# Altium PCB PCB_rev2_test.PcbDoc
Units mm, origin at the board's own origin, x right, y up, seen from the top; angles counter-clockwise.
Board outline 91.69 x 89.41 mm, 2 copper layers (Top Layer, Bottom Layer); 105 components, 67 nets, 363 pads, 6 vias.
Unrouted connection lines stored in the file: 238.
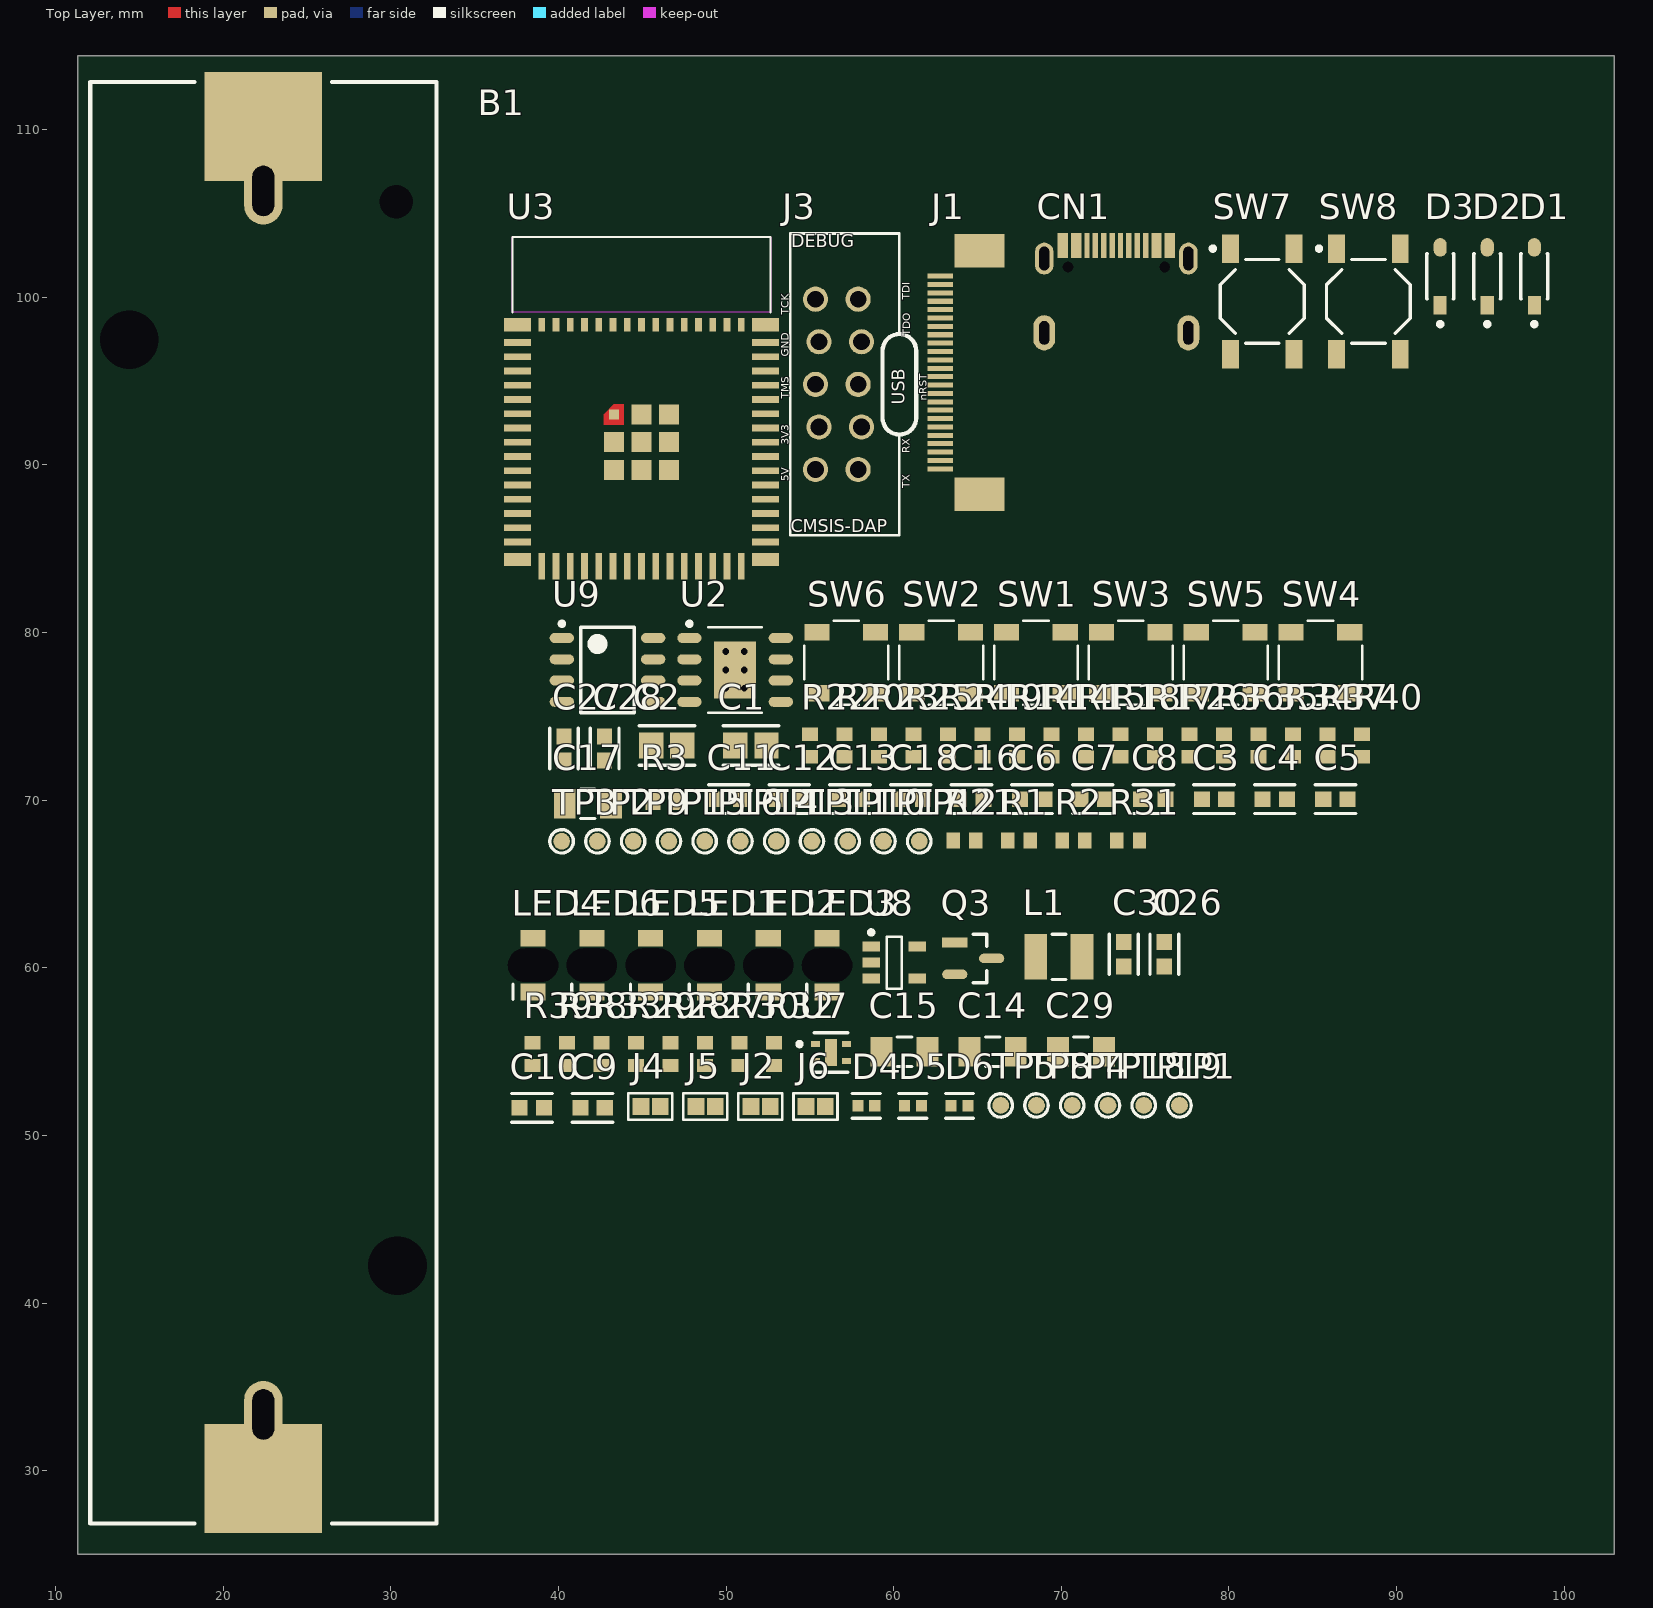
[diagram p0: Top Layer view]
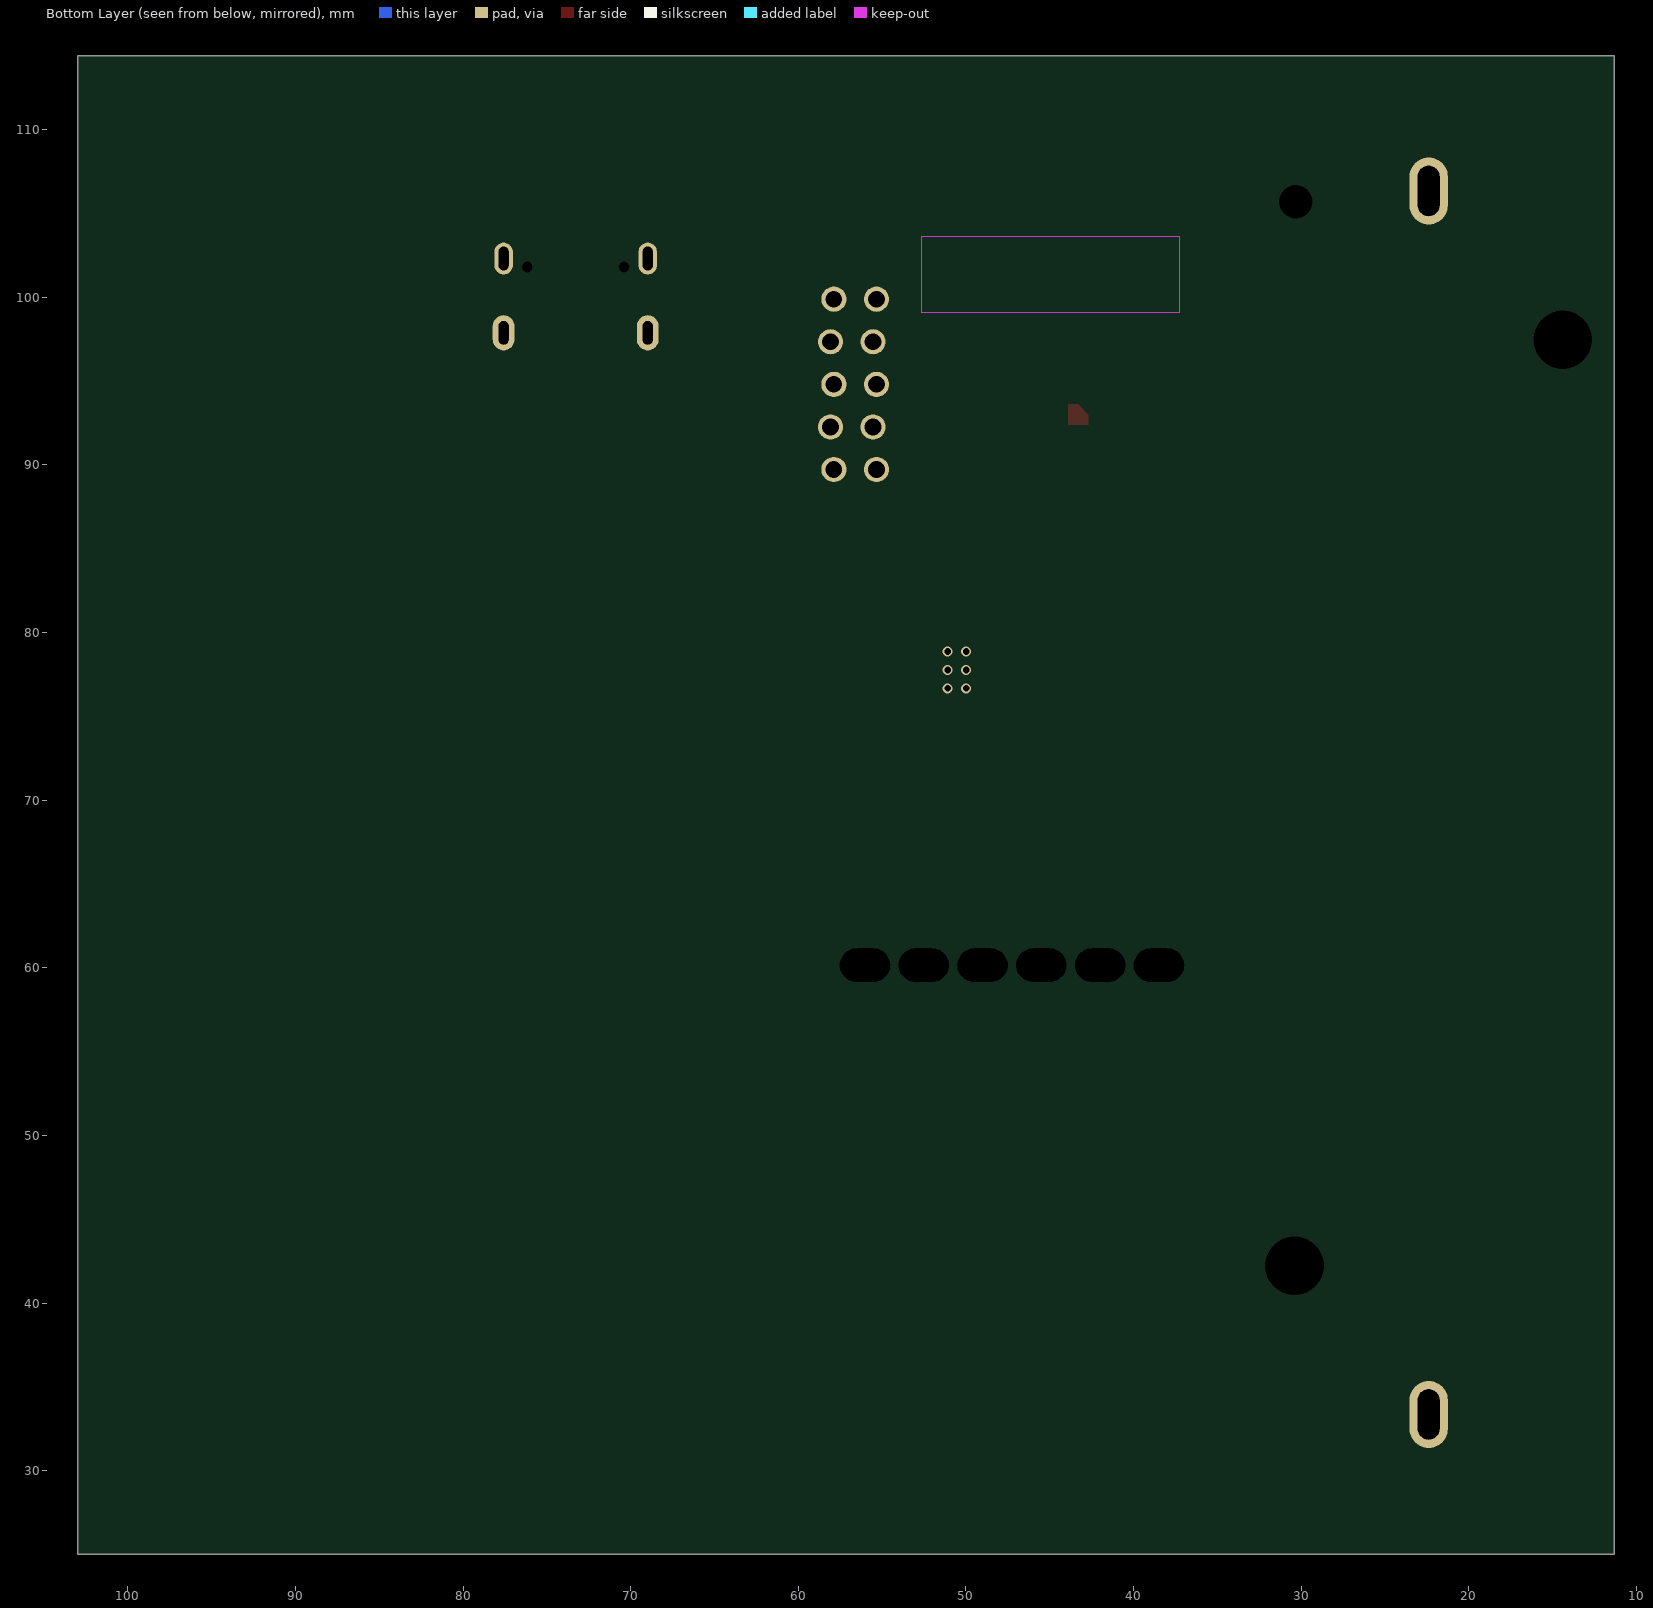
[diagram p1: Bottom Layer view, seen from below]

## Layer stack, top to bottom
Top Solder: solder mask 0.0102, Solder Resist, Dk 3.5
Top Layer: signal copper 0.0356
Dielectric 1: dielectric 0.32, FR-4, Dk 4.8
Bottom Layer: signal copper 0.0356
Bottom Solder: solder mask 0.0102, Solder Resist, Dk 3.5

## Board outline
11.303,25.019 11.303,114.427 102.997,114.427 102.997,25.019

## Design rules (kind name [scope] priority, off if disabled: settings)
Clearance [All] p1: gap=0.254 ignorepadtopadclearanceinfootprint=FALSE except(0: Arc-Hole Track-Hole SMDPad-Hole THPad-Hole Via-Hole Fill-Hole Poly-Hole Region-Hole Text-Hole)
DiffPairsRouting [All] p1: maxlimit=0.254 minlimit=0.254 mostfreqgap=0.254 toplayer_minwidth=0.381 toplayer_maxwidth=0.381 toplayer_prefwidth=0.381 bottomlayer_minwidth=0.381 bottomlayer_maxwidth=0.381 bottomlayer_prefwidth=0.381 maxuncoupledlength=12.7
PolygonConnect [All] p1: connectstyle=Relief reliefconductorwidth=0.254 reliefentries=4 polygonreliefangle="90 Angle" airgapwidth=0.254
RoutingVias [All] p1: holewidth=0.711 width=1.27 viastyle="Through Hole" minholewidth=0.711 minwidth=1.27 maxholewidth=0.711 maxwidth=1.27
SolderMaskExpansion [All] p1: expansion=0.102 istentingtop=FALSE
Width [All] p1: maxlimit=0.254 minlimit=0.254 preferedwidth=0.254
29 further rules are at their usual default settings.

## Classes and differential pairs
differential pair USB: +USB_P -USB_N

## Components (designator, comment, footprint, x,y, rotation, side; value= is the part's Value field where it differs from the comment)
B1 "18650 Li-Ion Battery" "18650 SMD holder" 22.388,69.852 r90 top
C1 "CL21A475KAQNNNE" FP-CL21-IPC_A 51.478,73.261 r0 top
C2 "CL21A475KAQNNNE" FP-CL21-IPC_A 46.463,73.261 r0 top
C3 "CL10A105KB8NNNC" FP-CL10B105KO8NNNC-IPC_B 79.111,70.063 r0 top value=1uF
C4 "CL10A105KB8NNNC" FP-CL10B105KO8NNNC-IPC_B 82.731,70.063 r0 top value=1uF
C5 "CL10A105KB8NNNC" FP-CL10B105KO8NNNC-IPC_B 86.352,70.063 r0 top value=1uF
C6 "CL10A105KB8NNNC" FP-CL10B105KO8NNNC-IPC_B 68.251,70.063 r0 top value=1uF
C7 "CL10A105KB8NNNC" FP-CL10B105KO8NNNC-IPC_B 71.871,70.063 r0 top value=1uF
C8 "CL10A105KB8NNNC" FP-CL10B105KO8NNNC-IPC_B 75.491,70.063 r0 top value=1uF
C9 "CL10A105KB8NNNC" FP-CL10B105KO8NNNC-IPC_B 42.03,51.648 r0 top value=1uF
C10 "CL10A105KB8NNNC" FP-CL10B105KO8NNNC-IPC_B 38.41,51.648 r0 top value=1uF
C11 "CL10A105KB8NNNC" FP-CL10B105KO8NNNC-IPC_B 50.15,70.063 r0 top value=1uF
C12 "CL10A105KB8NNNC" FP-CL10B105KO8NNNC-IPC_B 53.77,70.063 r0 top value=1uF
C13 "CL10A105KB8NNNC" FP-CL10B105KO8NNNC-IPC_B 57.391,70.063 r0 top value=1uF
C14 "CL31A226KPHNNNE" FP-CL31-IPC_B 65.905,54.995 r0 top
C15 "CL31A226KPHNNNE" FP-CL31-IPC_B 60.639,54.995 r0 top
C16 "CL10A105KB8NNNC" FP-CL10B105KO8NNNC-IPC_B 64.631,70.063 r0 top value=1uF
C17 "CL31A226KPHNNNE" FP-CL31-IPC_B 41.749,69.79 r0 top
C18 "CL10A105KB8NNNC" FP-CL10B105KO8NNNC-IPC_B 61.011,70.063 r0 top value=1uF
C26 "CL10A105KB8NNNC" FP-CL10B105KO8NNNC-IPC_B 76.142,60.806 r90 top value=1uF
C27 "CL10A105KB8NNNC" FP-CL10B105KO8NNNC-IPC_B 40.326,73.083 r90 top value=1uF
C28 "CL10A105KB8NNNC" FP-CL10B105KO8NNNC-IPC_B 42.746,73.083 r90 top value=1uF
C29 "CL31A226KPHNNNE" FP-CL31-IPC_B 71.171,54.995 r0 top
C30 "CL10A105KB8NNNC" FP-CL10B105KO8NNNC-IPC_B 73.722,60.806 r90 top value=1uF
CN1 "XKB U262-161N-4BVC11" "XKB U262-161N-4BVC11" 73.277,95.536 r0 top
D1 "MBR0530" FP-425-04-IPC_B 98.217,101.252 r90 top
D2 "MBR0530" FP-425-04-IPC_B 95.409,101.252 r90 top
D3 "MBR0530" FP-425-04-IPC_B 92.601,101.252 r90 top
D4 "LXES15AAA1-133" FP-LXES15-IPC_A 58.362,51.767 r0 top
D5 "LXES15AAA1-133" FP-LXES15-IPC_A 61.143,51.767 r0 top
D6 "LXES15AAA1-133" FP-LXES15-IPC_A 63.923,51.767 r0 top
J1 "XFCN F0501-T-24-20T-R" "XFCN F0501-T-24-20T-R" 62.55,95.519 r90 top
J2 "SolderJumper" SolderJumper_1mm 52.635,51.729 r0 top
J3 "DEBUG" "muselab cmsis-dap frictionfit" 55.334,94.811 r0 top
J4 "SolderJumper" SolderJumper_1mm 46.069,51.729 r0 top
J5 "SolderJumper" SolderJumper_1mm 49.352,51.729 r0 top
J6 "SolderJumper" SolderJumper_1mm 55.918,51.729 r0 top
L1 "CMI322513J680MT" FP-DFE322512C-IPC_B 69.855,60.659 r0 top value=68uH
LED1 "Everlight Elec 23-21B/T1D-CP2Q2TY/2A" "Everlight Elec 23-21B/T1D-CP2Q2TY/2A" 49.002,60.16 r90 top
LED2 "Everlight Elec 23-21B/T1D-CP2Q2TY/2A" "Everlight Elec 23-21B/T1D-CP2Q2TY/2A" 52.51,60.16 r90 top
LED3 "Everlight Elec 23-21B/T1D-CP2Q2TY/2A" "Everlight Elec 23-21B/T1D-CP2Q2TY/2A" 56.018,60.16 r90 top
LED4 "Everlight Elec 23-21B/T1D-CP2Q2TY/2A" "Everlight Elec 23-21B/T1D-CP2Q2TY/2A" 38.478,60.16 r90 top
LED5 "Everlight Elec 23-21B/T1D-CP2Q2TY/2A" "Everlight Elec 23-21B/T1D-CP2Q2TY/2A" 45.494,60.16 r90 top
LED6 "Everlight Elec 23-21B/T1D-CP2Q2TY/2A" "Everlight Elec 23-21B/T1D-CP2Q2TY/2A" 41.986,60.16 r90 top
Q3 "AO3400A" FP-SOT23-IPC_B 64.741,60.562 r0 top
R1 "0603WAF5101T5E" RESC1608X55X30NL15T15 67.473,67.586 r0 top value=5k1
R2 "0603WAF5101T5E" RESC1608X55X30NL15T15 70.731,67.586 r0 top value=5k1
R3 "ERJ-3GEYJ3R0V" RESC1608X55X30ML15T15 46.361,69.944 r0 top value=3R
R14 "0603WAF1501T5E" RESC1608X55X30NL15T15 67.362,73.264 r90 top value=1k5
R14 "0603WAF1004T5E" RESC1608X55X30NL15T15 69.42,73.264 r90 top value=1M
R15 "0603WAF1004T5E" RESC1608X55X30NL15T15 71.478,73.264 r90 top value=1M
R17 "0603WAF1501T5E" RESC1608X55X30NL15T15 75.594,73.264 r90 top value=1k5
R18 "0603WAF1501T5E" RESC1608X55X30NL15T15 73.536,73.264 r90 top value=1k5
R19 "0603WAF1501T5E" RESC1608X55X30NL15T15 65.304,73.264 r90 top value=1k5
R20 "0603WAF1004T5E" RESC1608X55X30NL15T15 57.072,73.264 r90 top value=1M
R21 "0603WAF1501T5E" RESC1608X55X30NL15T15 64.215,67.586 r0 top value=1k5
R22 "0603WAF1004T5E" RESC1608X55X30NL15T15 55.014,73.264 r90 top value=1M
R23 "0603WAF5100T5E" RESC1608X55X30NL15T15 59.13,73.264 r90 top value=10
R24 "0603WAF1004T5E" RESC1608X55X30NL15T15 63.246,73.264 r90 top value=1M
R25 "0603WAF5100T5E" RESC1608X55X30NL15T15 61.188,73.264 r90 top value=10
R26 "0603WAF1004T5E" RESC1608X55X30NL15T15 77.652,73.264 r90 top value=1M
R27 "0603WAF5100T5E" RESC1608X55X30NL15T15 48.728,54.849 r90 top value=10
R28 "0603WAF1004T5E" RESC1608X55X30NL15T15 46.67,54.849 r90 top value=1M
R29 "0603WAF5100T5E" RESC1608X55X30NL15T15 44.612,54.849 r90 top value=10
R30 "0603WAF1004T5E" RESC1608X55X30NL15T15 50.786,54.849 r90 top value=1M
R31 "0603WAF5100T5E" RESC1608X55X30NL15T15 73.989,67.586 r0 top value=10
R32 "0603WAF1004T5E" RESC1608X55X30NL15T15 52.844,54.849 r90 top value=1M
R33 "0603WAF5100T5E" RESC1608X55X30NL15T15 42.554,54.849 r90 top value=10
R34 "0603WAF5101T5E" RESC1608X55X30NL15T15 83.826,73.264 r90 top value=5k1
R35 "0603WAF5101T5E" RESC1608X55X30NL15T15 81.768,73.264 r90 top value=5k1
R36 "0603WAF5101T5E" RESC1608X55X30NL15T15 79.71,73.264 r90 top value=5k1
R37 "0603WAF5101T5E" RESC1608X55X30NL15T15 85.884,73.264 r90 top value=5k1
R38 "0603WAF5101T5E" RESC1608X55X30NL15T15 40.496,54.849 r90 top value=5k1
R39 "0603WAF5101T5E" RESC1608X55X30NL15T15 38.438,54.849 r90 top value=5k1
R40 "0603WAF1501T5E" RESC1608X55X30NL15T15 87.942,73.264 r90 top value=1k5
SW1 "Alps SKRB" "Alps SKRB" 68.483,78.202 r0 top
SW2 "Alps SKRB" "Alps SKRB" 62.825,78.202 r0 top
SW3 "Alps SKRB" "Alps SKRB" 74.141,78.202 r0 top
SW4 "Alps SKRB" "Alps SKRB" 85.457,78.202 r0 top
SW5 "Alps SKRB" "Alps SKRB" 79.799,78.202 r0 top
SW6 "Alps SKRB" "Alps SKRB" 57.167,78.202 r0 top
SW7 "TS-1187A-B-A-B" ESWI-TL3342F160QG_V 81.985,99.761 r0 top
SW8 "TS-1187A-B-A-B" ESWI-TL3342F160QG_V 88.318,99.761 r0 top
TP1 "test point 1.5mm" TP1_FULL 77.048,51.791 r0 top
TP2 "test point 1.5mm" TP1_FULL 42.316,67.548 r90 top
TP3 "test point 1.5mm" TP1_FULL 40.183,67.548 r90 top
TP4 "test point 1.5mm" TP1_FULL 70.647,51.791 r90 top
TP5 "test point 1.5mm" TP1_FULL 66.38,51.791 r90 top
TP8 "test point 1.5mm" TP1_FULL 68.514,51.791 r90 top
TP9 "test point 1.5mm" TP1_FULL 44.45,67.548 r90 top
TP10 "test point 1.5mm" TP1_FULL 57.252,67.548 r90 top
TP11 "test point 1.5mm" TP1_FULL 55.118,67.548 r90 top
TP12 "test point 1.5mm" TP1_FULL 61.519,67.548 r90 top
TP13 "test point 1.5mm" TP1_FULL 52.984,67.548 r90 top
TP14 "test point 1.5mm" TP1_FULL 50.851,67.548 r90 top
TP15 "test point 1.5mm" TP1_FULL 46.584,67.548 r90 top
TP16 "test point 1.5mm" TP1_FULL 48.717,67.548 r90 top
TP17 "test point 1.5mm" TP1_FULL 59.385,67.548 r90 top
TP18 "test point 1.5mm" TP1_FULL 72.781,51.791 r90 top
TP19 "test point 1.5mm" TP1_FULL 74.915,51.791 r90 top
U2 "TP4056" "Generic SOP8-PP" 50.533,77.772 r0 top
U3 "ESP32-S2-MINI-1" XCVR_ESP32-S2-MINI-1 44.95,91.361 r0 top
U7 "SHTC3" FP-SHTC3-MFG 56.252,54.949 r0 top
U8 "HT7830" "Diodes Inc SOT25" 60.028,60.312 r0 top
U9 "XB8608AF" "generic sop8" 42.922,77.772 r0 top

## Footprints (in the part's own frame and the unit in brackets; to place one, negate y for a bottom-side part, rotate by r counter-clockwise, add the part's x,y. Pads: shape width x height; smd on the part's side, far side on the other; paste and mask are expansions set on the pad)
"18650 SMD holder" [mm] "18650 SMD + THT holder"
  round 0 hole 2 unplated: H1(35.839,-7.937)
  round 0 hole 3.5 unplated: H2(27.623,8.001) H3(-27.623,-8.001)
  oval 4x2.3 hole 1.3 slot 3 at 0 deg: NEG(36.5,0) POS(-36.5,0)
  rect 6.5x7 smd: NEG(40.334,0) POS(-40.334,0)
  silkscreen extent -43,-10.33 43,10.33, body extent -43,-10.33 43,10.33, height 14.86
"Alps SKRB" [mm] "Alps SKRB SMD tactile button"
  rect 1.5x1 smd mask+0.05: 1(-1.75,1.825) 2(-1.75,-1.825) 3(1.75,1.825) 4(1.75,-1.825)
  silkscreen extent -2.5,-2.5 2.5,2.5, body extent -2.4,-2.4 2.4,2.4, height 0.55
"Diodes Inc SOT25" [mm] "SOT23, 5-Leads, Body 3.00x2.85mm, Pitch 0.95mm, IPC Medium Density"
  rect 1.05x0.6 smd: 1(-1.375,0.95) 2(-1.375,0) 3(-1.375,-0.95) 4(1.375,-0.95) 5(1.375,0.95)
  silkscreen extent -1.5,-1.55 0.45,1.92, body extent -1.5,-1.55 1.5,1.55, height 1.3
ESWI-TL3342F160QG_V [mm] "SMD, 4-Leads, Body 5x5mm, Pitch 6.3mm"
  rect 1x1.7 smd: 1(-1.9,3.15) 2(-1.9,-3.15) 3(1.9,3.15) 4(1.9,-3.15)
  silkscreen extent -3.07,-2.5 2.5,3.27, body extent -2.5,-2.5 2.5,2.5, height 1.5
"Everlight Elec 23-21B/T1D-CP2Q2TY/2A" [mm] "Reverse mount SMD LED, cool white"
  rect 1x1.5 smd: 1(1.6,0) 2(-1.6,0)
  round 0 hole 2 slot 3 at 90 deg unplated: 4(0,0)
  silkscreen extent -2.05,1.2 -1.15,1.2, body extent -1.6,-0.8 1.6,0.8, height 0.32
FP-425-04-IPC_B [mm]
  rect 1.108x0.782 smd paste+0 mask+0: 1(-1.73,0)
  rrect100% 1.108x0.782 smd paste+0 mask+0: 2(1.73,0)
  silkscreen extent -2.97,-0.8 1.35,0.8
FP-CL10B105KO8NNNC-IPC_B [mm]
  rect 0.958x0.912 smd paste+0 mask+0: 1(-0.727,0) 2(0.727,0)
  silkscreen extent -1.21,-0.86 1.21,0.86, body extent -1.46,-0.71 1.46,0.71, height 0.25
FP-CL21-IPC_A [mm]
  rect 1.455x1.556 smd paste+0 mask+0: 1(-0.926,0) 2(0.926,0)
  silkscreen extent -1.65,-1.18 1.65,1.18, body extent -2.15,-1.28 2.15,1.28, height 0.25
FP-CL31-IPC_B [mm]
  rect 1.305x1.758 smd paste+0 mask+0: 1(-1.376,0) 2(1.376,0)
  silkscreen extent -0.42,-0.88 0.42,0.88, body extent -2.28,-1.13 2.28,1.13, height 0.25
FP-DFE322512C-IPC_B [mm]
  rect 1.355x2.706 smd paste+0 mask+0: 1(-1.376,0) 2(1.376,0)
  silkscreen extent -0.4,-1.35 0.4,1.35, body extent -2.3,-1.6 2.3,1.6, height 0.25
FP-LXES15-IPC_A [mm]
  rect 0.665x0.672 smd paste+0 mask+0: 1(-0.504,0) 2(0.504,0)
  silkscreen extent -0.84,-0.74 0.84,0.74
FP-SHTC3-MFG [mm]
  rect 0.55x0.35 smd paste-1000 mask-1000: 1(-0.925,0.5) 2(-0.925,-0.5) 3(0.925,-0.5) 4(0.925,0.5)
  rect 0.7x1.6 smd paste-1000 mask+0: 5(0,0)
  silkscreen extent -2,-1.17 1,1.17, body extent -1.4,-1.1 1.4,1.1, height 0.25
FP-SOT23-IPC_B [mm]
  rect 1.505x0.572 smd paste+0 mask+0: 1(-1.1,0.95)
  rrect100% 1.505x0.572 smd paste+0 mask+0: 2(-1.1,-0.95) 3(1.1,0)
  silkscreen extent 0,-1.45 0.8,1.45, body extent -2.1,-1.7 2.1,1.7, height 0.25
"generic sop8" [mm] "designed for  XB8608AF"
  oval 1.45x0.6 smd: 1(-2.725,1.905) 2(-2.725,0.635) 3(-2.725,-0.635) 4(-2.725,-1.905) 5(2.725,-1.905) 6(2.725,-0.635) 7(2.725,0.635) 8(2.725,1.905)
  silkscreen extent -2.85,-2.55 1.6,2.88, body extent -3,-2.55 3,2.55, height 1.75
"Generic SOP8-PP" [mm] "generic SOP8-PP for TP4056"
  oval 1.45x0.6 smd: 1(-2.725,1.905) 2(-2.725,0.635) 3(-2.725,-0.635) 4(-2.725,-1.905) 5(2.725,-1.905) 6(2.725,-0.635) 7(2.725,0.635) 8(2.725,1.905)
  rect 2.52x3.41 smd: 9(0,0)
  silkscreen extent -2.85,-2.55 1.6,2.88, body extent -3,-2.55 3,2.55, height 1.75
"muselab cmsis-dap frictionfit" [mm]
  round 1.5 hole 1: 1(0,5.08) 2(0.2,2.54) 3(0,0) 4(0.2,-2.54) 5(0,-5.08) 6(2.54,-5.08) 7(2.74,-2.54) 8(2.54,0) 9(2.74,2.54) 10(2.54,5.08)
  silkscreen extent -1.5,-9 6,9
RESC1608X55X30ML15T15 [mm] "Chip Resistor, 2-Leads, Body 1.60x0.80mm, IPC Low Density"
  rect 0.9x1.05 smd: 1(-0.725,0) 2(0.725,0)
  body extent -0.87,-0.48 0.87,0.48, height 0.55
RESC1608X55X30NL15T15 [mm] "Chip Resistor, 2-Leads, Body 1.60x0.80mm, IPC Medium Density"
  rect 0.8x0.95 smd: 1(-0.675,0) 2(0.675,0)
  body extent -0.87,-0.48 0.87,0.48, height 0.55
SolderJumper_1mm [mm]
  rect 1x1 smd: 1(-1.15,0) 2(0,0)
  silkscreen extent -1.9,-0.8 0.72,0.8
TP1_FULL [mm]
  round 1 smd paste-0.5: 1(0,0)
  silkscreen extent -0.7,-0.7 0.7,0.7
XCVR_ESP32-S2-MINI-1 [mm]
  rect 1.6x0.4 smd: 1(-7.4,5.95) 2(-7.4,5.1) 3(-7.4,4.25) 4(-7.4,3.4) 5(-7.4,2.55) 6(-7.4,1.7) 7(-7.4,0.85) 8(-7.4,0) 9(-7.4,-0.85) 10(-7.4,-1.7) 11(-7.4,-2.55) 12(-7.4,-3.4) 13(-7.4,-4.25) 14(-7.4,-5.1) 15(-7.4,-5.95) 31(7.4,-5.95) 32(7.4,-5.1) 33(7.4,-4.25) 34(7.4,-3.4) 35(7.4,-2.55) 36(7.4,-1.7) 37(7.4,-0.85) 38(7.4,0) 39(7.4,0.85) 40(7.4,1.7) 41(7.4,2.55) 42(7.4,3.4) 43(7.4,4.25) 44(7.4,5.1) 45(7.4,5.95)
  rect 0.4x1.6 smd: 16(-5.95,-7.4) 17(-5.1,-7.4) 18(-4.25,-7.4) 19(-3.4,-7.4) 20(-2.55,-7.4) 21(-1.7,-7.4) 22(-0.85,-7.4) 23(0,-7.4) 24(0.85,-7.4) 25(1.7,-7.4) 26(2.55,-7.4) 27(3.4,-7.4) 28(4.25,-7.4) 29(5.1,-7.4) 30(5.95,-7.4)
  rect 0.4x0.8 smd: 46(5.95,7) 47(5.1,7) 48(4.25,7) 49(3.4,7) 50(2.55,7) 51(1.7,7) 52(0.85,7) 53(0,7) 54(-0.85,7) 55(-1.7,7) 56(-2.55,7) 57(-3.4,7) 58(-4.25,7) 59(-5.1,7) 60(-5.95,7)
  rect 1.2x1.2 smd: 61(0,0) 61_1(-1.65,0) 61_2(-1.65,-1.65) 61_3(0,-1.65) 61_4(1.65,-1.65) 61_5(1.65,0) 61_6(1.65,1.65) 61_7(0,1.65)
  rect 0.6x0.6 smd paste-1 mask+0: 61_8(-1.65,1.65)
  rect 1.6x0.8 smd: 62(-7.4,7) 63(-7.4,-7) 64(7.4,-7) 65(7.4,7)
  Top Layer region: -1.05,1.05 -2.25,1.05 -2.25,1.65 -1.65,2.25 -1.05,2.25
  Keep-Out Layer region: 7.7,7.75 -7.7,7.75 -7.7,12.25 7.7,12.25
  Keep-Out Layer region: 7.7,7.75 -7.7,7.75 -7.7,12.25 7.7,12.25
  silkscreen extent -7.7,7.75 7.7,12.25, body extent -7.7,-7.75 7.7,12.25, height 2.55
"XFCN F0501-T-24-20T-R" [mm]
  rect 0.3x1.5 smd mask+0.05: 1(5.75,-0.219) 2(5.25,-0.219) 3(4.75,-0.219) 4(4.25,-0.219) 5(3.75,-0.219) 6(3.25,-0.219) 7(2.75,-0.219) 8(2.25,-0.219) 9(1.75,-0.219) 10(1.25,-0.219) 11(0.75,-0.219) 12(0.25,-0.219) 13(-0.25,-0.219) 14(-0.75,-0.219) 15(-1.25,-0.219) 16(-1.75,-0.219) 17(-2.25,-0.219) 18(-2.75,-0.219) 19(-3.25,-0.219) 20(-3.75,-0.219) 21(-4.25,-0.219) 22(-4.75,-0.219) 23(-5.25,-0.219) 24(-5.75,-0.219)
  rect 2x3 smd: MP1(-7.265,-2.569) MP2(7.265,-2.569)
  body extent -8.25,-5.22 8.25,0, height 2.15
"XKB U262-161N-4BVC11" [mm] "USB Type-C connector XKB  U262-161N-4BVC11"
  rect 0.32x1.5 smd mask+0.05: A1(-3.35,7.55) A4(-2.55,7.55) A5(-1.25,7.55) A6(-0.25,7.55) A7(0.25,7.55) A8(1.25,7.55) A9(2.55,7.55) A12(3.35,7.55) B1(3.05,7.55) B4(2.25,7.55) B5(1.75,7.55) B6(0.75,7.55) B7(-0.75,7.55) B8(-1.75,7.55) B9(-2.25,7.55) B12(-3.05,7.55)
  round 0 hole 0.65 unplated mask+0.05: H1(-2.89,6.28) H2(2.89,6.28)
  oval 1.1x1.9 hole 0.6 slot 1.4 at 90 deg mask+0.05: SHELL1(-4.3,6.78) SHELL2(4.3,6.78)
  oval 1.3x2.1 hole 0.6 slot 1.4 at 90 deg mask+0.05: SHELL3(-4.3,2.35) SHELL4(4.3,2.35)
  body extent -4.45,0.05 4.45,7.61, height 3.3

## Part data
B1: "Lithium 18650 battery cell"
C1 C2: library part CMP-13271-002624-1, "CL21 Series 0805 4.7uF 25V ±10% Tolerance X5R Multilayer Ceramic Chip Capacitor", Capacitance=4.7uF, Case Code (Imperial)=0805, Case Code (Metric)=2012, Dielectric=X5R, LCSC=C1779, Max Operating Temperature=85°C, Min Operating Temperature=-55°C, Package Quantity=1, Tolerance=10%, Voltage Rating=25V, Case/Package=0805, Depth=1.25mm, Height=1.25mm, Lead Free="Lead Free", Length=2mm, Mount="Surface Mount", Packaging="Tape and Reel", Radiation Hardening=No, Thickness=0.055inch, Voltage Rating (DC)=25V, Width=0.049inch
C3 C4 C5 C6 C7 C8 C9 C10 C11 C12 C13 C16 C18 C26 C27 C28 C30: library part CMP-2000-06093-2, "CAP CER 1UF 50V X5R 0603", Capacitance=1uF, LCSC=C15849, Manufacturer="Samsung Electro-Mechanics America, Inc", Manufacturer Part Number=CL10B105KO8NNNC, Temperature="-55°C to +125°C", Temperature Characteristic=X5R, Temperature Coefficient=15%, Temperature Range High=+125°C, Temperature Range Low=-55°C, Tolerance=10%, Voltage Rating=50V, Automotive=No, Category=Cap, ComponentLink2Description=Datasheet, ComponentLink2URL=http://www.samsungsem.com/global/front/downloadcms.do?path=%2F%2Fglobal%2F%2Fsupport%2F%2Fproduct-search%2F%2Fmlcc%2F%2F__icsFiles%2F%2Fafieldfile%2F%2F2019%2F%2F06%2F%2F18&fileName=CL10B105KO8NNNC-19.pdf, Device Class L1="Passive Components", Device Class L2=Capacitors, Device Class L3="Ceramic Capacitors", Digikey Description="CAP CER 1UF 16V X7R 0603", Height=0.9mm, Ipc Land Pattern Name=CAPC16080X80, Lead Free=Yes, Material=Ceramic, Octopart=https://octopart.com/cl10b105ko8nnnc-samsung-19018973, Package=CL10B105KO8NNNC, RoHS=TRUE
C14 C15 C17 C29: library part CMP-13271-002604-1, "Cap Ceramic 22uF 10V X5R ±10% SMD 1206", Capacitance=22uF, Case Code (Imperial)=1206, Case Code (Metric)=3216, Dielectric=X5R, LCSC=C5672, Max Operating Temperature=85°C, Min Operating Temperature=-55°C, Package Quantity=1, Tolerance=10%, Voltage Rating=10V, Case/Package=1206, Depth=1.6mm, Height=1.6mm, Lead Free="Lead Free", Length=3.2mm, Mount="Surface Mount", Packaging="Tape and Reel", Radiation Hardening=No, Thickness=0.071inch, Voltage Rating (DC)=10V, Width=0.063inch
CN1: "USB Type-C connector, USB-2.0, 16 pins", LCSC=C319148
D1 D2 D3: library part CMP-2000-05113-2, "DIODE SCHOTTKY 30V 500MA SOD123", Average Rectified Current=500mA, Forward Voltage=430mV, LCSC=C77336, Max Forward Surge Current (Ifsm)=5.5A, Max Operating Temperature=150°C, Max Repetitive Reverse Voltage (Vrrm)=30V, Max Reverse Leakage Current=130uA, Min Operating Temperature=-65°C, Package Quantity=1, Contact Plating=Tin, Current Rating=500mA, Element Configuration=Single, Forward Current=500mA, Height=1.03mm, Lead Free="Lead Free", Length=2.7mm, Max Reverse Voltage (DC)=30V, Max Surge Current=5.5A, Mount="Surface Mount", Number of Pins=2, Output Current=500mA, Packaging="Tape and Reel", Peak Non-Repetitive Surge Current=5.5A, Peak Reverse Current=130uA, Polarity=Standard, Radiation Hardening=No, REACH SVHC="No SVHC", Voltage Rating (DC)=30V, Weight=0.03g, Width=1.6mm
D4 D5 D6: library part CMP-06195-000011-1, "TVS DIODE 15V 1005", Case Code (Imperial)=0402, Case Code (Metric)=1005, LCSC=C191267, Max Operating Temperature=85°C, Min Operating Temperature=-40°C, Power Line Protection=No, Resistor Type=Zener, Reverse Standoff Voltage=15V, Case/Package=0402, Mount="Surface Mount", Number of Bidirectional Channels=1, Packaging="Tape and Reel"
J1: "XFCN F0501-T-24-20T-R 0.5mm fpc top contacts, slide retentioner", LCSC=C840496
J3: library part "MuseLab CMSIS-DAP probe receiving connector"
L1: library part CMP-06042-000782-1, "CMI322513J680MT 1210 chip SMD inductor 68uH", LCSC=C401470
LED1 LED2 LED3 LED4 LED5 LED6: "reverse mount SMD led, cool white"
Q3: library part CMP-83955-000006-1, "MOSFET N-CH 30V 5.7A SOT23", Case/Package=SOT-23, Continuous Drain Current (ID)=5.7A, Drain to Source Voltage (Vdss)=30V, Gate to Source Voltage (Vgs)=12V, Input Capacitance=630pF, LCSC=C20917, Max Operating Temperature=150°C, Max Power Dissipation=1.4W, Min Operating Temperature=-55°C, Lead Free="Lead Free", Mount="Surface Mount", Number of Elements=1, Number of Pins=3, Packaging="Tape and Reel", Power Dissipation=1.4W, Radiation Hardening=No, Rds On Max=26.5mR
R1 R2 R34 R35 R36 R37 R38 R39: library part CMP-2000-00540-1, LCSC=C23186, Manufacturer=UNI_ROYAL, Part Number=0603WAF5101T5E
R3: library part CMP-2000-00787-1, LCSC=C403494, Manufacturer=Panasonic, Part Number=ERJ-3GEYJ3R0V
R14 R17 R18 R19 R21 R40: library part CMP-2000-00540-1, LCSC=C22843, Manufacturer=UNI_ROYAL, Part Number=0603WAF5101T5E
R14 R15 R20 R22 R24 R26 R28 R30 R32: library part CMP-1012-00849-2, LCSC=C22935, Manufacturer=Panasonic, Part Number=0603WAF1004T5E
R23 R25 R27 R29 R31 R33: library part CMP-2000-00540-1, LCSC=C23193, Manufacturer=UNI_ROYAL, Part Number=0603WAF5101T5E
SW1 SW2 SW3 SW4 SW5 SW6: "SKRB series SMD tactile button Alps Alpine", LCSC=C139790, ComponentLink1Description=Datasheet, ComponentLink1URL=https://tech.alpsalpine.com/prod/e/html/tact/surfacemount/skrb/skrbake010.html, Variant=SKRBAKE010
SW7 SW8: library part CMP-1696-00003-1, "XKB TS-1187A-B-A-B C318884", LCSC=C318884
TP1 TP2 TP3 TP4 TP5 TP8 TP9 TP10 TP11 TP12 TP13 TP14 TP15 TP16 TP17 TP18 TP19: library part "Test Point", "Test point ,1.5mm diameter, no hole", Category=testpoints
U2: "1s Lithium linear battery charger, 1A output", LCSC=C16581, ComponentLink1Description=Datasheet, ComponentLink1URL=https://static.chipdip.ru/lib/977/DOC002977110.pdf
U3: "WiFi 802.11b/g/n Transceiver Module 2.412GHz ~ 2.484GHz Antenna Not Included Surface Mount", LCSC=C2847294, Package="NON STANDARD-65 Espressif Systems", Availability="In Stock", Check_prices=https://www.snapeda.com/parts/ESP32-S2-MINI-1/Espressif+Systems/view-part/?ref=eda, MF="Espressif Systems", MP=ESP32-S2-MINI-1, Price=None, Purchase-URL=https://pricing.snapeda.com/search/part/ESP32-S2-MINI-1/?ref=eda, SnapEDA_Link=https://www.snapeda.com/parts/ESP32-S2-MINI-1/Espressif+Systems/view-part/?ref=snap
U7: library part CMP-144040-000003-1, "SENSOR HUMI/TEMP I2C 2% SMD", LCSC=C2880044, Manufacturer=Sensirion, Max Supply Voltage=3.6V, Min Supply Voltage=1.62V, Operating Supply Current=0.3-900uA, Package=0, Temperature="-40°C to +125°C", Temperature Range High=+125°C, Temperature Range Low=-40°C, Accuracy=2%, Automotive=No, Category=IC, ComponentLink2Description=Datasheet, ComponentLink2URL=https://www.sensirion.com/fileadmin/user_upload/customers/sensirion/Dokumente/0_Datasheets/Humidity/Sensirion_Humidity_Sensors_SHTC3_Datasheet.pdf, Device Class L1=Sensors, Device Class L2="Temperature and Humidity Sensors", Device Class L3=unset, Digikey Description="SENSOR HUMI/TEMP I2C 2% SMD", Height=0.75mm, Interface=I2C, Ipc Land Pattern Name=DFN200X200X75-4, Lead Free=Yes, Manufacturer Part Number=SHTC3, Mouser Description="SHTC3 Series 0 to 100% RH 3.6 V Humidity and Temperature Sensor IC - DFN-4", Octopart=https://octopart.com/shtc3-sensirion-91912225, Resolution=16bits, RoHS=TRUE, Sensor Output=I2C
U8: "500mA 3.0V linear LDO, 4uA Iq", LCSC=C259915
U9: "XYSEMI 1s Li-Ion integrated protection IC"

## Via types
v1: diameter 0.6, hole 0.4, Top Layer to Bottom Layer, 6 vias

## Nets (pads, with @x,y where several pads share a name; then routed paths per layer and width w, separated by ;. In a path a pad name is that pad's centre, name@x,y a point inside that pad or via, vN(x,y) a via of type N, cw(c..) or ccw(c..) an arc to the next point about the centre after c; other vN are vias at no path point)
+3V3: C2.1 C6.1 C27.1 C28.1 C29.1 J1.15 J1.16 J2.1 J4.1 J4.2 J6.1 L1.1 R17.2 R18.2 R20.1 R21.2 SW1.2 SW2.2 SW3.2 SW4.2 SW5.2 SW6.2 U7.1 U8.5
+Vbat: C3.1 C15.1 J5.2 R15.2 R40.2 U2.5 U8.1 U8.3
+Vbus: C14.1 CN1.A4 CN1.A9 CN1.B4 CN1.B9 D6.2 U2.4 U2.8
BAT_NEG: B1.NEG C30.2 U9.5 U9.7 U9.8
BST_EN: U3.17
BTN_1: R22.1 U3.5
BTN_2: R24.1 U3.6
BTN_3: R26.1 U3.7
BTN_4: R28.1 U3.8
BTN_5: R30.1 U3.9
BTN_6: R32.2 U3.10
CH_CHRG: TP4.1 U2.7
CH_STDBY: TP5.1 U2.6 U3.16
DISP_BS: J1.8
DISP_BUSY: J1.9 TP14.1 U3.11
DISP_CLK: J1.13 TP17.1 U3.32
DISP_CS: J1.12 TP13.1 U3.29
DISP_D/C: J1.11 TP16.1 U3.12
DISP_GDR: J1.2 Q3.1 R19.2
DISP_PREVGH: C10.1 D3.1 J1.21 TP12.1
DISP_PREVGL: C12.1 D1.2 J1.23 TP11.1
DISP_RESE: J1.3 Q3.2 R3.1
DISP_RST: J1.10 R20.2 TP18.1 U3.13
DISP_SDI: J1.14 TP15.1 U3.31
ESP_DBG_RX: J3.7 U3.40
ESP_DBG_TX: J3.6 U3.39
ESP_EN: C16.1 J3.8 R21.1 SW8.2 TP3.1 U3.45
ESP_IO0: SW7.2 TP19.1 U3.4
ESP_SCL: R17.1 TP9.1 U3.15 U7.2
ESP_SDA: R18.1 TP10.1 U3.14 U7.3
ESP_TCK: J3.1 U3.35
ESP_TDI: J3.10 U3.37
ESP_TDO: J3.9 U3.36
ESP_TMS: J3.3 U3.38
GND: C2.2 C3.2 C4.2 C5.2 C6.2 C7.2 C8.2 C9.2 C10.2 C11.2 C12.2 C13.2 C14.2 C15.2 C16.2 C17.2 C18.2 C26.2 C27.2 C28.2 C29.2 CN1.A1 CN1.A12 CN1.B1 CN1.B12 CN1.SHELL1 CN1.SHELL2 CN1.SHELL3 CN1.SHELL4 D2.1 D4.1 D5.1 D6.1 J1.17 J1.MP1 J1.MP2 J3.2 LED1.2 LED2.2 LED3.2 LED4.2 LED5.2 LED6.2 R1.1 R2.1 R3.2 R14.1 R19.1 R34.1 R35.1 R36.1 R37.1 R38.1 R39.1 SW7.4 SW8.4 U2.1 U2.3 U2.9 U3.1 U3.2 U3.30 U3.42 U3.43 U3.46 U3.47 U3.48 U3.49 U3.50 U3.51 U3.52 U3.53 U3.54 U3.55 U3.56 U3.57 U3.58 U3.59 U3.60 U3.61 U3.61_1 U3.61_2 U3.61_3 U3.61_4 U3.61_5 U3.61_6 U3.61_7 U3.61_8 U3.62 U3.63 U3.64 U3.65 U7.4 U8.2 U9.1 U9.2 U9.3
  other v1: 49.983,76.672 51.083,76.672 49.983,77.772 51.083,77.772 49.983,78.872 51.083,78.872
LED_1: R23.1 U3.19
LED_2: R25.1 U3.20
LED_3: R27.1 U3.21
LED_4: R29.1 U3.41
LED_5: R31.1 U3.34
LED_6: R33.1 U3.33
NetB1_POS: B1.POS J5.1
NetC1_1: C1.1 D1.1 D2.2
NetC1_2: C1.2 D3.2 L1.2 Q3.3
NetC4_1: C4.1 J1.4
NetC5_1: C5.1 J1.5
NetC7_1: C7.1 J1.18
NetC8_1: C8.1 J1.19
NetC9_1: C9.1 J1.20
NetC11_1: C11.1 J1.22
NetC13_1: C13.1 J1.24
NetC17_1: C17.1 C18.1 J2.2 U3.3
NetC30_1: C30.1 R40.1 U9.6
NetJ3_4: J3.4 J6.2
NetLED5_1: LED5.1 R31.2
NetR14_2: R14.2@67.362,73.939 U2.2
NetR22_2: R22.2 R34.2 SW1.1
NetR24_2: R24.2 R35.2 SW2.1
NetR26_2: R26.2 R36.2 SW3.1
NetR28_2: R28.2 R37.2 SW4.1
NetR30_2: R30.2 R38.2 SW5.1
NetR32_1: R32.1 R39.2 SW6.1
USB_CC1: CN1.A5 R2.2 TP1.1
USB_CC2: CN1.B5 R1.2 TP2.1
USB_N: CN1.A7 CN1.B7 D4.2 U3.23
USB_P: CN1.A6 CN1.B6 D5.2 U3.24
VBAT_ADC: C26.1 R14.2@69.42,73.939 R15.1 TP8.1 U3.18
pads on no net: B1.H1 B1.H2 B1.H3 CN1.A8 CN1.B8 CN1.H1 CN1.H2 J1.1 J1.6 J1.7 J3.5 LED1.1 LED1.4 LED2.1 LED2.4 LED3.1 LED3.4 LED4.1 LED4.4 LED5.4 LED6.1 LED6.4 R23.2 R25.2 R27.2 R29.2 R33.2 SW1.3 SW1.4 SW2.3 SW2.4 SW3.3 SW3.4 SW4.3 SW4.4 SW5.3 SW5.4 SW6.3 SW6.4 SW7.1 SW7.3 SW8.1 SW8.3 U3.22 U3.25 U3.26 U3.27 U3.28 U3.44 U7.5 U8.4 U9.4

## Text inside footprints (layer, text, board x,y; h text height)
J3: Top Overlay "GND" at 53.903,96.445 h0.8 r90; Top Overlay "3V3" at 53.903,91.203 h0.8 r90; Top Overlay "5V" at 53.903,89.035 h0.8 r90; Top Overlay "TCK" at 53.903,98.958 h0.8 r90; Top Overlay "RX" at 61.139,90.692 h0.8 r90; Top Overlay "TDO" at 61.153,97.721 h0.8 r90; Top Overlay "TX" at 61.139,88.607 h0.8 r90; Top Overlay "nRST" at 62.153,93.819 h0.8 r90; Top Overlay "TDI" at 61.146,99.857 h0.8 r90; Top Overlay "CMSIS-DAP" at 53.845,85.731 h1.3; Top Overlay "USB" at 60.914,93.594 h1.3 r90; Top Overlay "TMS" at 53.903,93.945 h0.8 r90